# Altium PCB DisplayPrint.PcbDoc
Units mil, origin at the board's own origin, x right, y up, seen from the top; angles counter-clockwise.
Board outline 3600 x 1500 mil, 2 copper layers (Top Layer, Bottom Layer); 15 components, 75 nets, 97 pads, 3 vias.
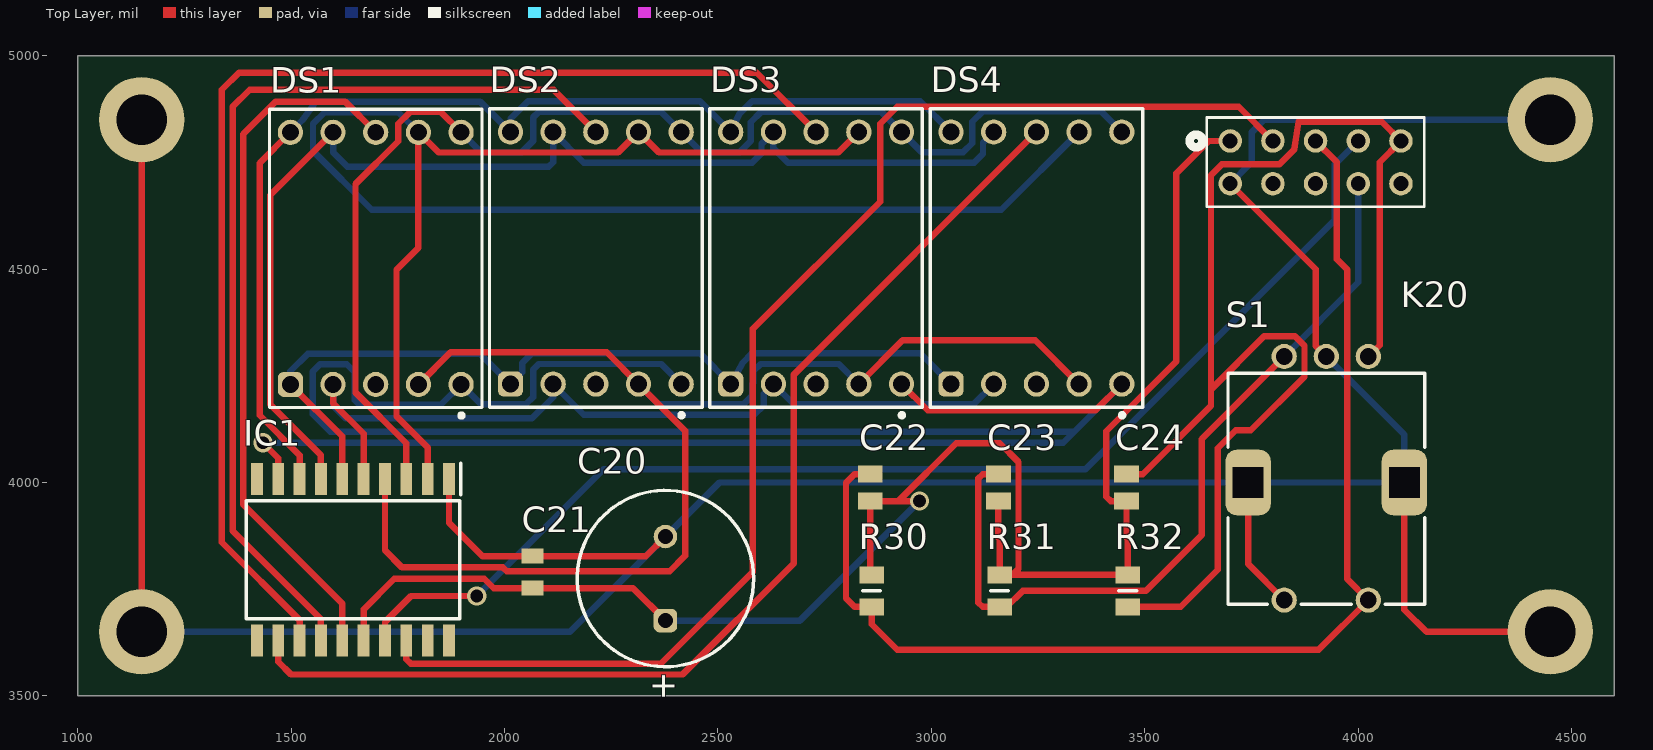
[diagram p0: Top Layer view]
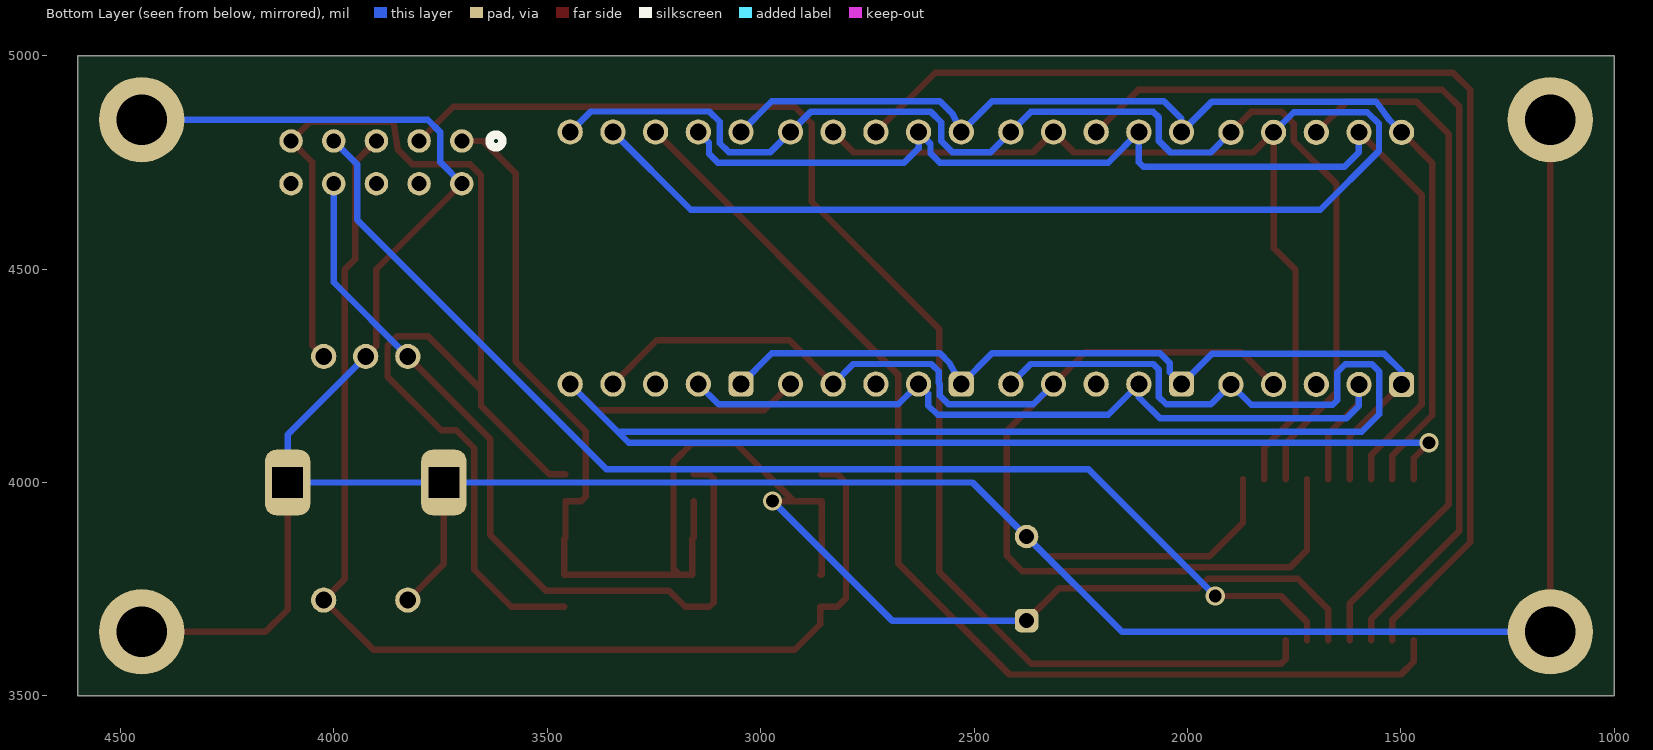
[diagram p1: Bottom Layer view, seen from below]
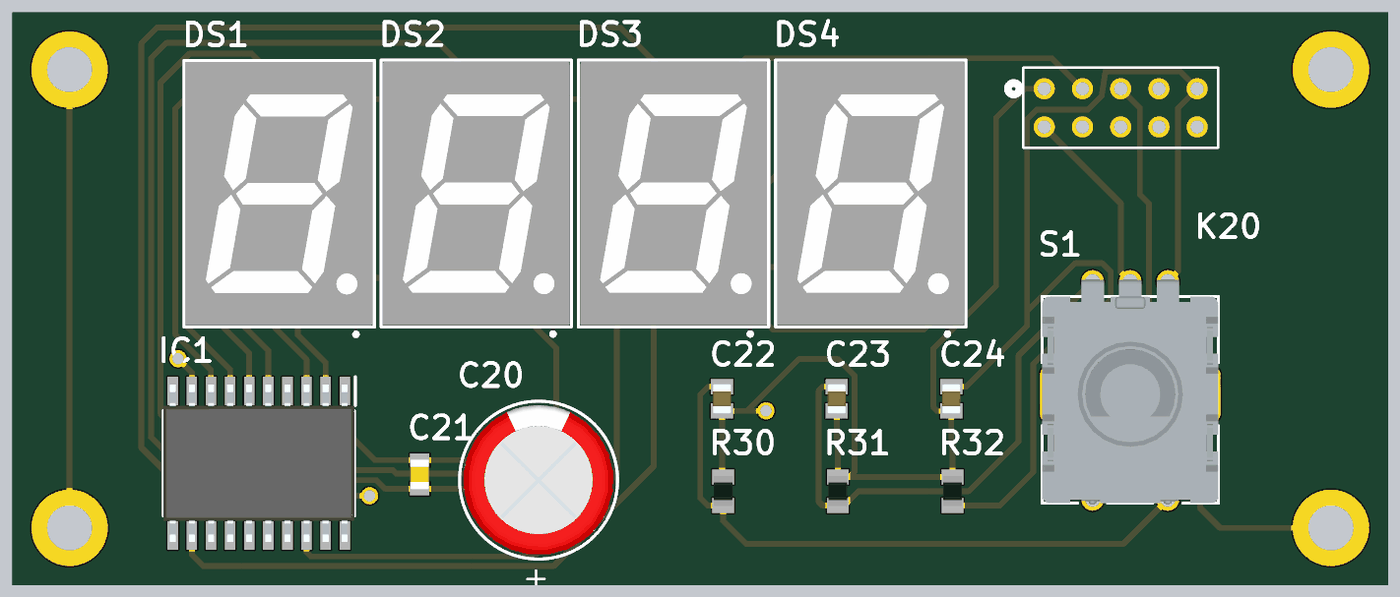
[diagram p2: 3D render of the assembled board from above, using the file's embedded part models]

## Layer stack, top to bottom
Top Solder: solder mask 0.4, Solder Resist, Dk 3.5
Top Layer: signal copper 1.4
Dielectric 1: dielectric 12.6, FR-4, Dk 4.8
Bottom Layer: signal copper 1.4
Bottom Solder: solder mask 0.4, Solder Resist, Dk 3.5

## Board outline
1000,3500 4600,3500 4600,5000 1000,5000

## Design rules (kind name [scope] priority, off if disabled: settings)
Clearance Clearance_1 [All] p1: gap=10 ignorepadtopadclearanceinfootprint=FALSE except(0: Arc-Hole Track-Hole SMDPad-Hole THPad-Hole Via-Hole Fill-Hole Poly-Hole Region-Hole Text-Hole)
Clearance [All] p2: gap=10 ignorepadtopadclearanceinfootprint=FALSE except(0: Arc-Hole Track-Hole SMDPad-Hole THPad-Hole Via-Hole Fill-Hole Poly-Hole Region-Hole Text-Hole)
DiffPairsRouting [All] p1: maxlimit=20 minlimit=10 mostfreqgap=15 toplayer_minwidth=10 toplayer_maxwidth=20 toplayer_prefwidth=15 bottomlayer_minwidth=10 bottomlayer_maxwidth=20 bottomlayer_prefwidth=15 maxuncoupledlength=500
Height [All] p1: minheight=0 maxheight=1500 prefheight=500
HoleSize [All] p1: absolutevalues=TRUE maxlimit=150 minlimit=1 maxpercent=80.000 minpercent=20.000
PolygonConnect [All] p1: connectstyle=Relief reliefconductorwidth=10 reliefentries=4 polygonreliefangle="90 Angle" airgapwidth=10
RoutingVias [All] p1: holewidth=30 width=45 viastyle="Through Hole" minholewidth=28 minwidth=40 maxholewidth=35 maxwidth=100
SolderMaskExpansion [All] p1: expansion=4 istentingtop=FALSE
UnRoutedNet [All] p1: checkbadconnections=TRUE
Width [All] p1: maxlimit=30 minlimit=10 preferedwidth=15 minimp=50.000000 maximp=50.000000 favimp=50.000000
26 further rules are at their usual default settings.

## Components (designator, comment, footprint, x,y, rotation, side; value= is the part's Value field where it differs from the comment)
C20 "100µF" WCAP-AT1H_D10H16 2377,3775 r270 top
C21 "100nF" WCAP-CSGP_0805_L2W1.25H0.8_Reflow 2066,3790 r90 top
C22 "10nF" CAPC2012X100N 2857,3988 r90 top
C23 "10nF" CAPC2012X100N 3157,3988 r90 top
C24 "10nF" CAPC2012X100N 3457,3988 r90 top
DS1 "157136S12801" WL-T7DS_L17.5W12.4H7 1698.43,4525 r0 top
DS2 "157136S12801" WL-T7DS_L17.5W12.4H7 2214,4525.72 r0 top
DS3 "157136S12801" WL-T7DS_L17.5W12.4H7 2730,4525.72 r0 top
DS4 "157136S12801" WL-T7DS_L17.5W12.4H7 3246,4525.72 r0 top
IC1 "TM1637__SOP_" SOIC127P1045X280-20N 1645,3819 r270 top
K20 "10 pin" 215307-5_TYC 3700,4800 r0 top
R30 "10k" RESC2012X60N 2860,3746 r90 top
R31 "10k" RESC2012X60N 3160,3746 r90 top
R32 "10k" RESC2012X60N 3460,3746 r90 top
S1 "482016514001" 4820xx514001 3925,4000 r90 top

## Footprints (in the part's own frame and the unit in brackets; to place one, negate y for a bottom-side part, rotate by r counter-clockwise, add the part's x,y. Pads: shape width x height; smd on the part's side, far side on the other; paste and mask are expansions set on the pad)
4820xx514001 [mm] "20 pulse with 20 Detent, half  cut shaft with Bushing, THT vertical  Encoder, with switch Function"
  round 1.5 hole 1: 1(-7,-2.5) 2(-7,2.5) A(7.5,-2.5) B(7.5,2.5) C(7.5,0)
  rrect50% 3.9x2.7 hole 1.8 square: S1(0,4.65) S2(0,-4.65)
  silkscreen extent -7.25,-5.85 6.5,5.85, body extent -7.3,-5.85 7.6,5.85, height 26.65
215307-5_TYC [mil]
  round 55 hole 35 mask+0: 1(0,0) 2(100,0) 3(200,0) 4(300,0) 5(400,0) 6(400,-100) 7(300,-100) 8(200,-100) 9(100,-100) 10(0,-100)
  silkscreen extent -95,-154 455,55, body extent 0,0 10,10, height 10
CAPC2012X100N [mm]
  rect 1.02x1.47 smd: 1(-0.8,0) 2(0.8,0)
  body extent -1,-0.63 1,0.63, height 1
RESC2012X60N [mm]
  rect 1x1.45 smd: 1(-0.95,0) 2(0.95,0)
  silkscreen extent 0,-0.53 0,0.53, body extent -1,-0.63 1,0.63, height 0.5
SOIC127P1045X280-20N [mm]
  rect 1.9x0.7 smd: 1(-4.8,5.715) 2(-4.8,4.445) 3(-4.8,3.175) 4(-4.8,1.905) 5(-4.8,0.635) 6(-4.8,-0.635) 7(-4.8,-1.905) 8(-4.8,-3.175) 9(-4.8,-4.445) 10(-4.8,-5.715) 11(4.8,-5.715) 12(4.8,-4.445) 13(4.8,-3.175) 14(4.8,-1.905) 15(4.8,-0.635) 16(4.8,0.635) 17(4.8,1.905) 18(4.8,3.175) 19(4.8,4.445) 20(4.8,5.715)
  silkscreen extent -5.75,-6.35 3.5,6.42, body extent -5.23,-6.35 5.23,6.35, height 2.8
WCAP-AT1H_D10H16 [mm] "Aluminium Electrolytic Radial THD Capacitors, 10x16mm"
  rrect50% 1.4x1.4 hole 0.9: 1(2.5,0)
  round 1.4 hole 0.9: 2(-2.5,0)
  silkscreen extent -5.25,-5.25 5.25,5.25, body extent -4.99,-5 5,5, height 16.26
WCAP-CSGP_0805_L2W1.25H0.8_Reflow [mm] "Ceramic Capacitors, body 2x1.25mm"
  rect 0.9x1.3 smd: 1(-0.95,0) 2(0.95,0)
  body extent -1,-0.62 1,0.63, height 0.8
WL-T7DS_L17.5W12.4H7 [mm] "7 Segments Display THT Single Digit , body 12.4x17.5mm"
  rrect50% 1.5x1.5 hole 1: 1(-5.08,-7.5)
  round 1.5 hole 1: 2(-2.54,-7.5) 3(0,-7.5) 4(2.54,-7.5) 5(5.08,-7.5) 6(5.08,7.5) 7(2.54,7.5) 8(0,7.5) 9(-2.54,7.5) 10(-5.08,7.5)
  silkscreen extent -6.32,-9.47 6.32,8.88, body extent -6.2,-8.75 6.2,8.75, height 7.1

## Part data
C20: library part "ELCAP 100µF", "Capacitor Polarised 100µF Wurth 860241181006", Manufacturer_Name="Wurth Elektronik", Manufacturer_Part_Number=860241181006, Datasheet Link=https://www.we-online.de/katalog/datasheet/860241181006.pdf, Height=27mm
C21: library part "CAP 0.1µF (100nF)", "Capacitor C0805C104K8RACAUTO", Manufacturer_Name=Kemet, Manufacturer_Part_Number=C0805C104K8RACAUTO, Datasheet Link=https://ad.componentsearchengine.com/Datasheets/2/C0805C104K8RACAUTO.pdf, Height=0.88mm
C22 C23 C24: library part "CAP 0.01µF (10nF)", "Capacitor C0805C103K1HACAUTO", Manufacturer_Name=Kemet, Manufacturer_Part_Number=C0805C103K1HACAUTO, Mouser2 Part Number=80-C0805C103K1HAUTO, Datasheet Link=https://componentsearchengine.com//C0805C103K1HACAUTO.pdf, Height=1mm, Mouser2 Price/Stock=https://www.mouser.com/Search/Refine.aspx?Keyword=80-C0805C103K1HAUTO
DS1 DS2 DS3 DS4: "WL-T7DS 7 Segments Display THT Single Digit, Common Anode, 0.52\" / 13.2mm, 38mcd, 2V, Super Red", Emitting Color="Super Red", Forward Voltage=2V, Manufacturer="Wurth Elektronik", Operating Temperature max.=85C, Operating Temperature min.=-40C, Circuitry="Common Anode", ComponentLink1Description="Manufacturer Link", ComponentLink1URL=http://www.we-online.de, ComponentLink2Description=Datasheet, ComponentLink2URL=https://www.we-online.com/catalog/datasheet/157136S12801.pdf, Display Height="0.52\" / 13.2mm", Height=7mm, Length=17.5mm, Luminous Intensity=38mcd, Manufacturer Part Number=157136S12801, Mounting Technology=THT, Packaging=Tube, Width=12.4mm
IC1: "Integrated Circuit", Manufacturer_Name="TITAN MICRO ELECTRONICS", Manufacturer_Part_Number="TM1637 (SOP)", Datasheet Link=https://www.mcielectronics.cl/website_MCI/static/documents/Datasheet_TM1637.pdf, Height=2.8mm
K20: library part "Header 2x5", "Header, 5-Pin, Dual row", LatestRevisionDate=17-Jul-2002, LatestRevisionNote="Re-released for DXP Platform.", Publisher="Altium Limited"
R30 R31 R32: library part "RES 10k 0805", "10k SMD 0805  CR0805-FX-1002ELF", Manufacturer_Name=Bourns, Manufacturer_Part_Number=CR0805-FX-1002ELF, Mouser2 Part Number=652-CR0805FX-1002ELF, Datasheet Link=https://componentsearchengine.com//CR0805-FX-1002ELF.pdf, Height=0.6mm, Mouser2 Price/Stock=https://www.mouser.com/Search/Refine.aspx?Keyword=652-CR0805FX-1002ELF
S1: "WS-ENTV Mechanical Incremental Encoder Switch, Metal Shaft with bushing, 15Pulse/360deg, 30positions, 10mA", Insulation Resistance=100MOhm, Manufacturer="Wurth Elektronik", Operating Temperature="-40 to +85degC", Rated Current=10mA, ComponentLink1Description=Manufacturer, ComponentLink1URL=http://www.we-online.de, ComponentLink2Description=Datasheet, ComponentLink2URL=https://www.we-online.com/catalog/datasheet/482016514001.pdf, Detent=30positions, Electrical Life Encoder=15000Cycles, Electrical Life Switch=20000Cycles, Manufacturer Part Number=482016514001, Mounting Technology=THT, Operation Force=600g, Packaging=Tray, Published Date="May 2021", Resolution=15Pulse/360deg, Size=L13.75W11.7H26.6

## Free pads (board coordinates)
  round 200 hole 118.11: 18(1150,4850) 19(4450,4850) 20(4450,3650) 21(1150,3650)

## Via types
v1: diameter 45, hole 30, Top Layer to Bottom Layer, 3 vias

## Nets (pads, with @x,y where several pads share a name; then routed paths per layer and width w, separated by ;. In a path a pad name is that pad's centre, name@x,y a point inside that pad or via, vN(x,y) a via of type N, cw(c..) or ccw(c..) an arc to the next point about the centre after c; other vN are vias at no path point)
+5: C20.1 C21.1 C22.1 C23.1 C24.1 IC1.16 K20.1 R30.2 R31.2 R32.2 | length 4160.6
  Top Layer w15: IC1.16 1670,3702.6 1742,3774.6 1952.53,3774.6 1974.54,3752.6 C21.1 2300.98,3752.6 C20.1 ; R30.2 2857,3783.4 C22.1 2923,3956.5 ; v1(2972,3956.5) 2923,3956.5 ; C23.1 3157,3871 3160,3868 R31.2 3190,3783.4 ; K20.1 3649.82,4800 3574,4724.18 3574,4284 3410,4120 3410,3966.5 3420,3956.5 C24.1 3457,3871 3460,3868 R32.2 3190,3783.4 ; 2923,3956.5 3058.5,4092 3160,4092 3204,4048 3204,3797.4 3190,3783.4
  Bottom Layer w15: C20.1 2692.07,3676.57 v1(2972,3956.5)
GND: C20.2 C21.2 IC1.1 K20.10 pad.18 pad.19 pad.20 pad.21 S1.2 S1.C S1.S1 S1.S2 | length 7658
  Top Layer w15: pad.21 pad.18 ; IC1.1 1870,3906 1948.6,3827.4 C21.2 2330.98,3827.4 C20.2 ; K20.10 3900.6,4499.4 3900.6,4319.68 S1.C ; S1.S1 3741.93,3809.05 S1.2 ; S1.S2 4108.07,3701.93 4160,3650 pad.20
  Bottom Layer w15: pad.21 2153.57,3650 C20.2 2503.57,4000 S1.S1 S1.S2 4108.07,4112.21 S1.C ; K20.10 3750,4750 3750,4820 3780,4850 pad.19
NetBR1_1: 
NetBR1_2: 
NetBR1_3: 
NetBR2_2: 
NetC7_2: 
NetC11_2: 
NetC13_2: 
NetC14_1: 
NetC14_2: 
NetC22_2: C22.2 K20.3 R30.1 S1.1 | length 2808.3
  Top Layer w15: C22.2 2820,4019.5 2800,3999.5 2800,3728.6 2820,3708.6 R30.1 2860,3668 2920,3608 3907.02,3608 S1.1 3974,3773.84 3974,4499 3950,4523 3950,4750 K20.3
NetC23_2: C23.2 K20.7 R31.1 S1.B | length 1914
  Top Layer w15: C23.2 3120,4019.5 3110,4009.5 3110,3718.6 3120,3708.6 R31.1 3176.6,3708.6 3214,3746 3502,3746 3633,3877 3633,4101.7 S1.B
  Bottom Layer w15: S1.B 4000,4468.7 K20.7
NetC24_2: C24.2 K20.5 R32.1 S1.A | length 3041.8
  Top Layer w15: C24.2 3495,4019.5 3655,4179.5 3655,4218 ; R32.1 3584,3708.6 3671,3795.6 3671,4080 3713,4122 3748,4122 3874,4248 3874,4320 3851,4343 3780,4343 3655,4218 ; S1.A 4050,4321.85 4050,4750 K20.5 4055,4845 3860,4845 3850,4780 3815,4745 3680,4745 3655,4720 3655,4218
NetDS1_1: DS1.1 DS2.1 DS3.1 DS4.1 IC1.6 | length 2037.7
  Top Layer w15: DS1.1 1620,4108.15 IC1.6
  Bottom Layer w15: DS1.1 1498.43,4260.6 1539.58,4301.75 1942.7,4301.75 DS2.1 2041.97,4258.42 2041.97,4280 2064.45,4302.48 2457.97,4302.48 DS3.1 2557.97,4280.45 2580,4302.48 2973.97,4302.48 DS4.1
NetDS1_2: DS1.2 DS2.2 DS3.2 DS4.2 IC1.5 | length 2027.5
  Top Layer w15: DS1.2 1598.43,4185.67 1670,4114.09 IC1.5
  Bottom Layer w15: DS1.2 1598.43,4179.73 1628.16,4150 2064,4150 2114,4200 DS2.2 2186.03,4158.42 2585.41,4158.42 2606.99,4180 2606.99,4207.44 DS3.2 2677.45,4183 3098.55,4183 DS4.2
NetDS1_4: DS1.4 DS2.4 DS3.4 DS4.4 IC1.4 | length 3157
  Top Layer w15: IC1.4 1720,3841 1760,3801 1996,3801 2005,3792 2387,3792 2423,3828 2423,4121.45 DS2.4 2239.45,4305 1873.7,4305 DS1.4 ; DS3.4 2932.55,4333 3243.45,4333 DS4.4
  Bottom Layer w15: DS2.4 2361.03,4183.42 2560,4183.42 2580,4203.42 2580,4230 2582.97,4232.97 2582.97,4260.45 2600,4277.48 2782.97,4277.48 DS3.4
NetDS1_5: DS1.5 DS2.5 DS3.5 DS4.5 IC1.9 | length 5719.1
  Top Layer w15: v1(1434,4093) 1470,4057 IC1.9 ; DS3.5 2991.45,4169 3384.55,4169 DS4.5
  Bottom Layer w15: v1(1434,4093) 3308.55,4093 3334.55,4119 ; DS2.5 2366.97,4277.48 2080,4277.48 2066.97,4264.45 2066.97,4199.97 2050,4183 1945.15,4183 DS1.5 1850.7,4182 1660,4182 1649,4193 1649,4258 1630.25,4276.75 1567.75,4276.75 1551,4260 1551,4160 1592,4119 3334.55,4119 ; DS4.5 3334.55,4119
NetDS1_6: DS1.6 DS2.6 DS3.6 DS4.6 IC1.3 | length 2971.5
  Top Layer w15: IC1.3 1770,4091.64 1651,4210.64 1651,4699 1751,4799 1751,4840 1779,4868 1850.7,4868 DS1.6
  Bottom Layer w15: DS1.6 1945.7,4773 2040,4773 2066.97,4799.97 2066.97,4855 2080,4868.03 2366.97,4868.03 DS2.6 2461.03,4773.97 2551,4773.97 2577.03,4800 2577.03,4844.03 2601.03,4868.03 2882.97,4868.03 DS3.6 2977.03,4773.97 3074.97,4773.97 3096,4795 3096,4845 3120,4869 3398,4869 DS4.6
NetDS1_7: DS1.7 DS2.7 DS3.7 DS4.7 IC1.2 | length 4242.8
  Top Layer w15: IC1.2 1820,4082 1747,4155 1747,4498.57 1798.43,4550 DS1.7 1845.7,4773 2266,4773 DS2.7 2362,4773 2782,4773 DS3.7
  Bottom Layer w15: DS1.7 1751.4,4867.3 1578.7,4867.3 1551.4,4840 1551.4,4776.6 1689,4639 3164,4639 DS4.7
NetDS1_8: DS1.8 IC1.15 | length 1654
  Top Layer w15: IC1.15 1620,3716.48 1388,3948.48 1388,4816.15 1464.15,4892.3 1626.4,4892.3 DS1.8
NetDS1_9: DS1.9 DS2.9 DS3.9 DS4.9 IC1.7 | length 2775.4
  Top Layer w15: IC1.7 1570,4064.09 1451.4,4182.7 1451.4,4673.25 DS1.9
  Bottom Layer w15: DS1.9 1598.43,4773.6 1632.03,4740 2104,4740 2114,4750 DS2.9 2186.03,4748.97 2580,4748.97 2602.03,4771 2602.03,4793.03 DS3.9 2630,4783.01 2664.03,4748.97 3100,4748.97 3121,4769.97 3121,4796 DS4.9
NetDS1_10: DS1.10 DS2.10 DS3.10 DS4.10 IC1.8 | length 2638.6
  Top Layer w15: DS1.10 1426.4,4748.25 1426.4,4157.7 1520,4064.09 IC1.8
  Bottom Layer w15: DS1.10 1526.4,4848.25 1558.7,4892.3 1942.7,4892.3 DS2.10 2014,4852.03 2055,4893.03 2457.97,4893.03 DS3.10 2549.38,4862.41 2580,4893.03 2973.97,4893.03 DS4.10
NetDS2_8: DS2.8 IC1.14 | length 2244.3
  Top Layer w15: IC1.14 1570,3680 1363,3887 1363,4880 1403,4920 2115,4920 DS2.8
NetDS3_8: DS3.8 IC1.13 | length 2831.5
  Top Layer w15: IC1.13 1520,3678 1338,3860 1338,4920 1378,4960 2591,4960 DS3.8
NetDS4_8: DS4.8 IC1.12 | length 2623.7
  Top Layer w15: IC1.12 1470,3580 1499.88,3550.12 2417.12,3550.12 2678,3811 2678,4253 DS4.8
NetIC1_17: IC1.17 K20.4 | length 2865.9
  Top Layer w15: IC1.17 1720,3673 1781,3734 v1(1935,3734)
  Bottom Layer w15: v1(1935,3734) 2232,4031 3361,4031 3945,4615 3945,4745 K20.4
NetIC1_18: IC1.18 K20.2 | length 3092.1
  Top Layer w15: IC1.18 1770,3586 1780.88,3575.12 2366.12,3575.12 2582,3791 2582,4360 2880,4658 2880,4840 2920,4880 3720,4880 K20.2
NetIC2_1: 
NetIC2_2: 
NetIC2_6: 
NetIC2_7: 
NetIC3_1: 
NetIC3_2: 
NetIC3_7: 
NetIC3_8: 
NetIC3_12: 
NetIC3_13: 
NetIC3_14: 
NetIC3_15: 
NetIC3_16: 
NetIC3_19: 
NetIC3_20: 
NetIC3_21: 
NetIC3_22: 
NetIC3_23: 
NetIC3_24: 
NetIC3_27: 
NetIC3_28: 
NetIC3_30: 
NetIC3_33: 
NetIC3_34: 
NetIC3_35: 
NetIC3_36: 
NetIC3_37: 
NetIC3_38: 
NetIC3_39: 
NetIC3_40: 
NetK1_1: 
NetK2_2: 
NetK3_2: 
NetK8_1: 
NetK8_2: 
NetL2_4: 
NetR7_1: 
NetR11_1: 
NetR17_1: 
NetR18_1: 
NetR18_2: 
RegT4-MainR19: 
VerR5-mainIO9: 
VerR14-mainIO10: 
Vin: 
VoeR6R3-mainIO11: 
VoeRE1mainT1: 
pads on no net: DS1.3 DS2.3 DS3.3 DS4.3 IC1.10 IC1.11 IC1.19 IC1.20 K20.6 K20.8 K20.9

## Text inside footprints (layer, text, board x,y; h text height)
C20: Top Overlay "+" at 2347.47,3556.5 h59.06 r270